# Altium PCB 1.8-TFT-128x160.PcbDoc
Units mil, origin at the board's own origin, x right, y up, seen from the top; angles counter-clockwise.
Board outline 2216.1 x 1354.33 mil, 2 copper layers (Top Layer, Bottom Layer); 12 components, 17 nets, 60 pads, 34 vias.
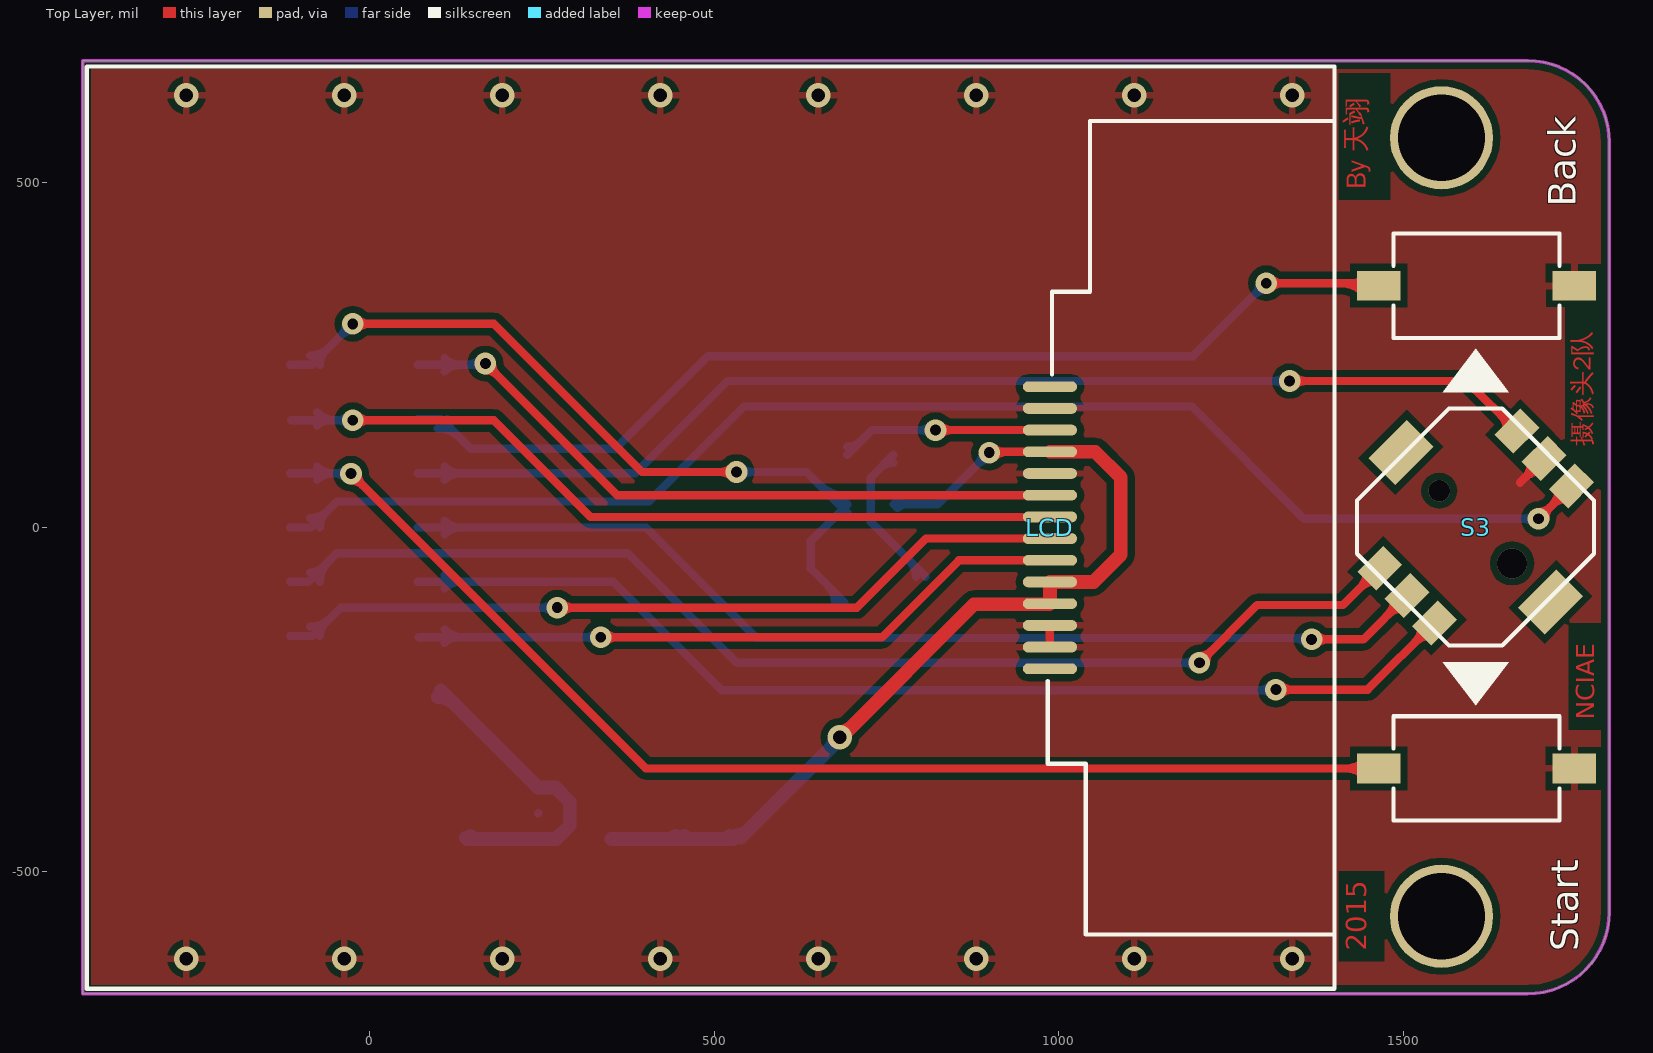
[diagram p0: Top Layer view]
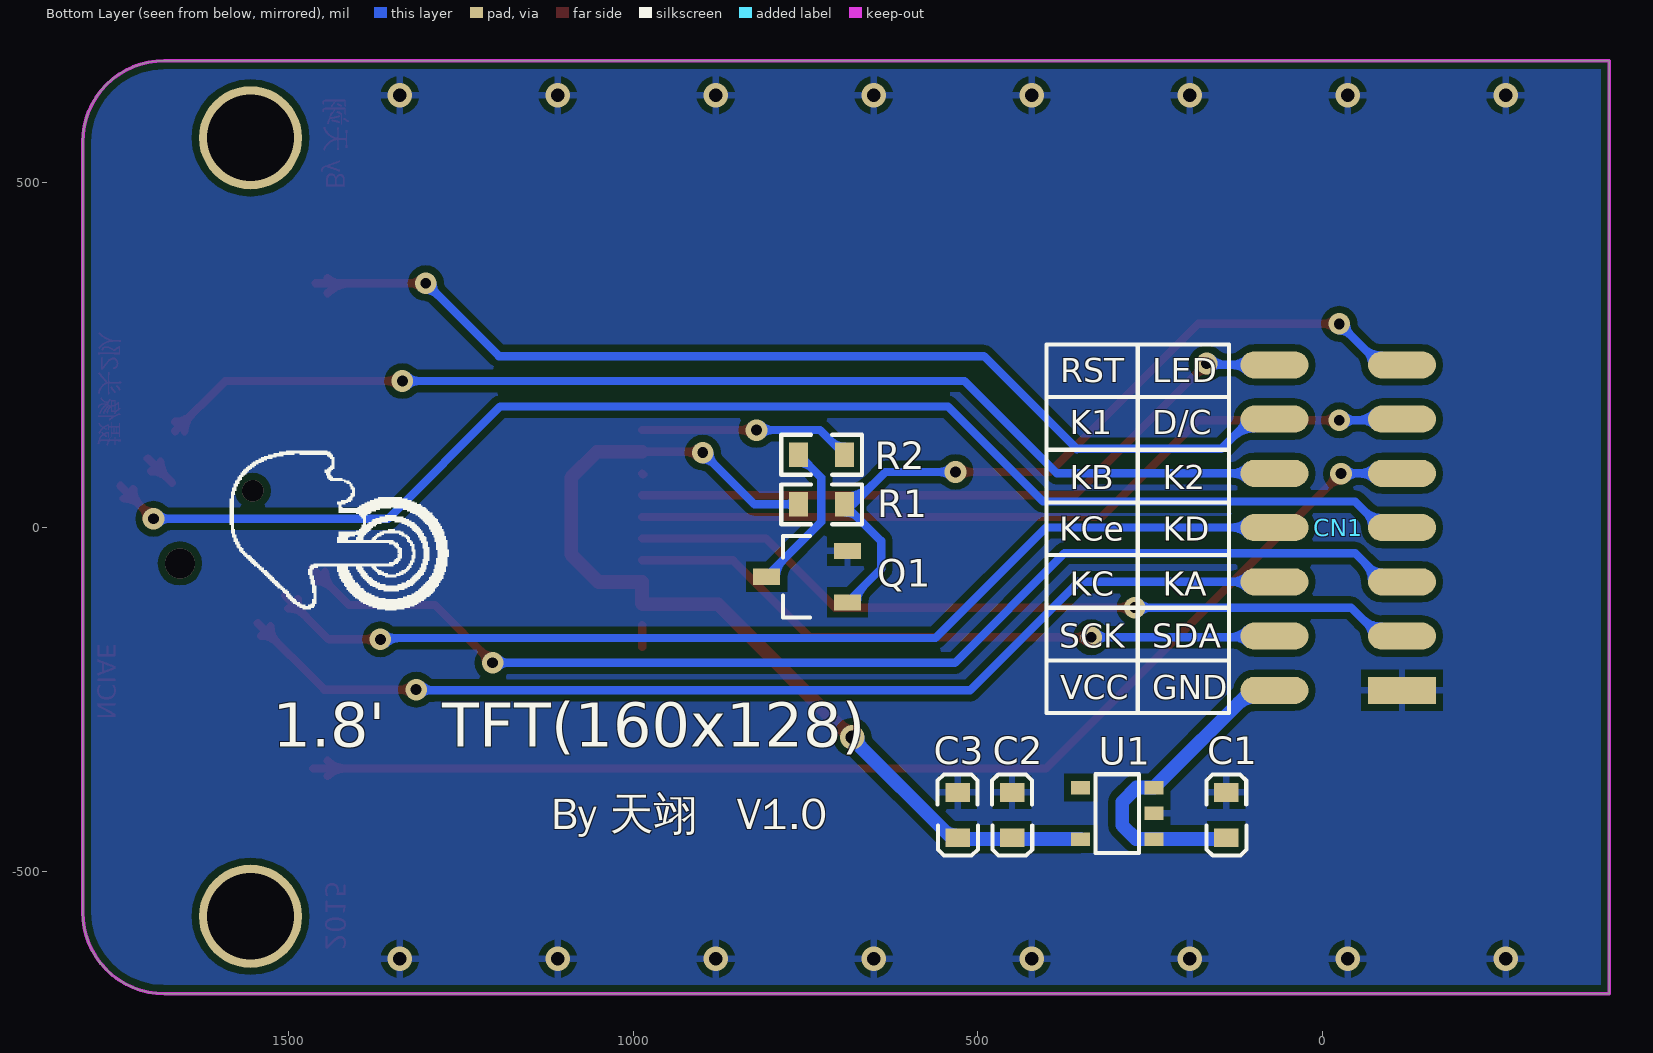
[diagram p1: Bottom Layer view, seen from below]
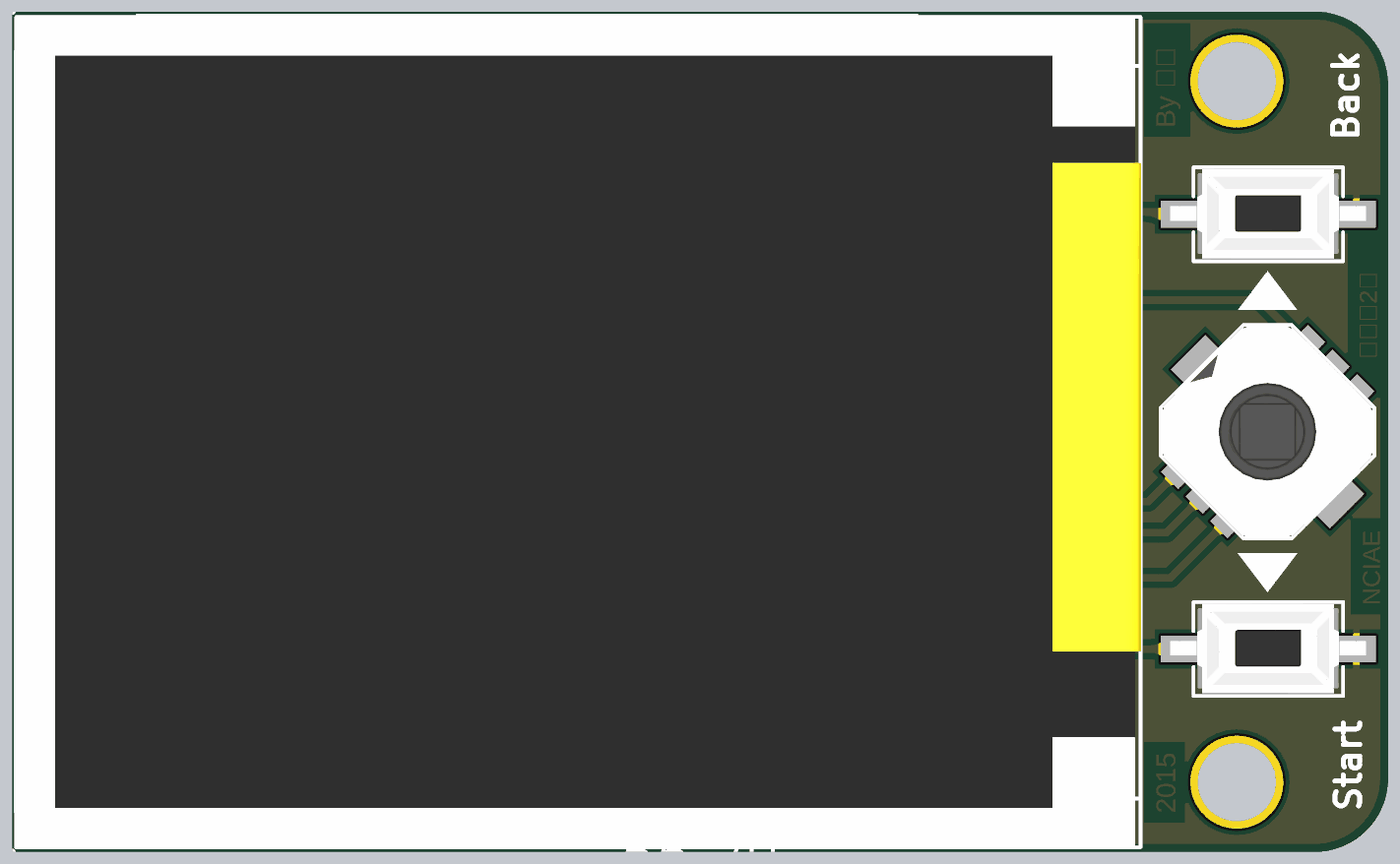
[diagram p2: 3D render of the assembled board from above, using the file's embedded part models]
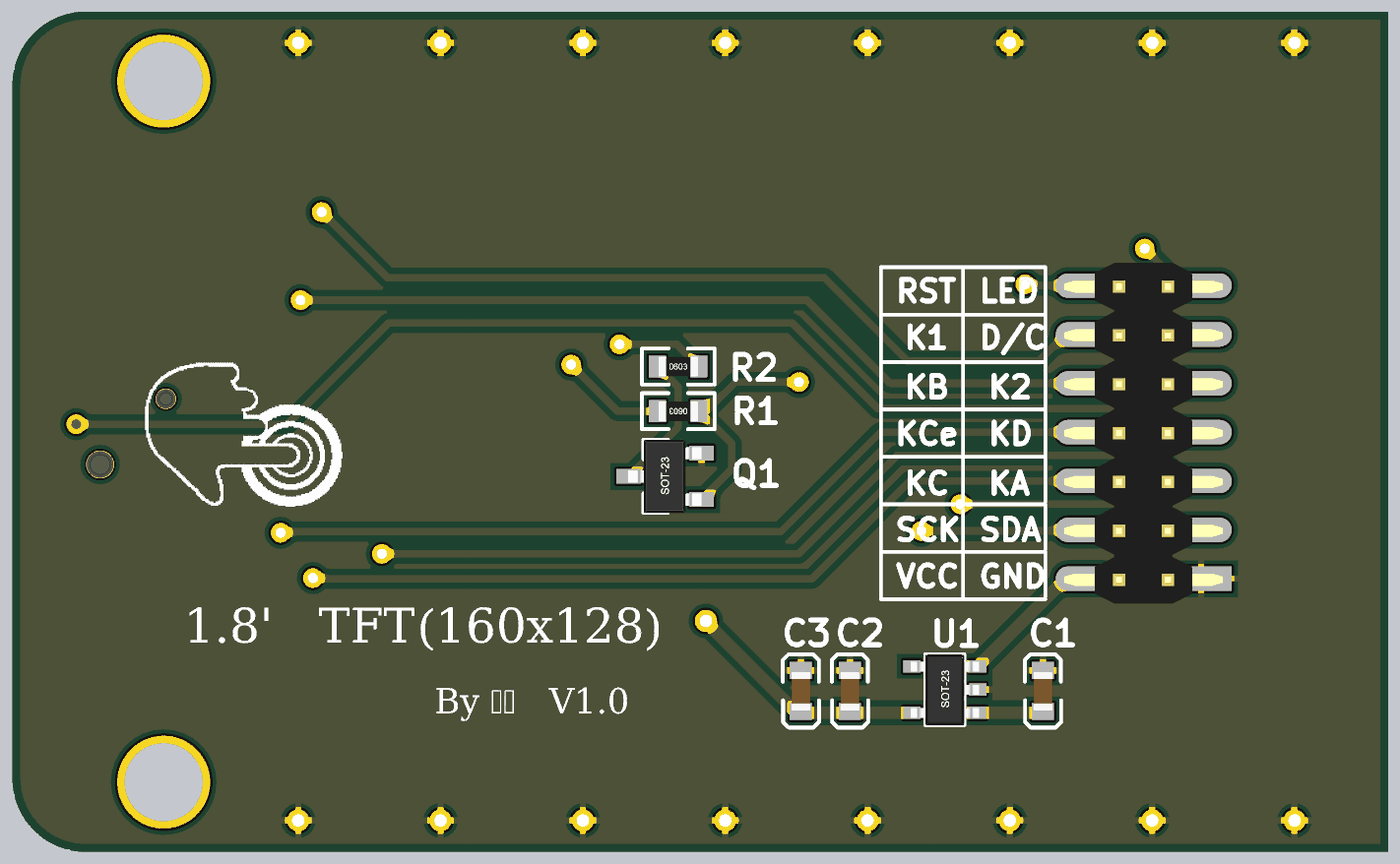
[diagram p3: 3D render of the assembled board from below, using the file's embedded part models]

## Layer stack, top to bottom
Top Layer: signal copper 1.4
Dielectric: dielectric 12.6, FR-4, Dk 4.8
Bottom Layer: signal copper 1.4

## Board outline
-417,-677.33 -417,677 1680.99,677 cw(c1680.99,558.89) 1799.1,558.89 1799.1,-559.22 cw(c1680.99,-559.22) 1680.99,-677.33

## Design rules (kind name [scope] priority, off if disabled: settings)
Clearance [All] p1: gap=10
ComponentClearance [All] p1: gap=0 collisioncheckmode=3 verticalgap=0 showdistances=FALSE
FabricationTestPointUsage TestPointUsage [All] p1: valid=0 allowmultiple=FALSE
FabricationTestpoint Testpoint [All] p1: side=3 testpointundercomponent=TRUE minsize=40 maxsize=100 preferedsize=60 minholesize=0 maxholesize=40 preferedholesize=32 testpointgrid=1 allowsidetop=TRUE allowsidebottom=TRUE usegrid=TRUE gridtolerance=0.01
HoleSize [All] p1: absolutevalues=TRUE maxlimit=157.48 minlimit=1 maxpercent=80.000 minpercent=20.000
PolygonConnect [All] p1: connectstyle=Relief reliefconductorwidth=10 reliefentries=4 polygonreliefangle="90 Angle" airgapwidth=10
RoutingVias [All] p1: holewidth=28 width=50 viastyle="Through Hole" minholewidth=28 minwidth=50 maxholewidth=28 maxwidth=50
SilkToSolderMaskClearance SilkscreenOverComponentPads [IsPad] p1: minsilkscreentomaskgap=10 clearancetoexposedcopper=TRUE
SolderMaskExpansion [All] p1: expansion=4
Width [All] p1: maxlimit=20 minlimit=10 preferedwidth=10
23 further rules are at their usual default settings.

## Components (designator, comment, footprint, x,y, rotation, side; value= is the part's Value field where it differs from the comment)
Back "Key" SW-PB-2 1606.3,350.39 r0 top locked (schematic designator S1)
C1 "0.1uF" CAP-0603 139,-385 r270 bottom
C2 "10nF" CAP-0603 450,-385 r270 bottom
C3 "4.7uF" CAP-0603 529,-385 r270 bottom
CN1 "CON-7X2" Pin-Header-2.00-Straight_SMD-14 -116,-237 r0 bottom
LCD "LCD-1.8-128*160" LCD-1.8-128*160-14P 987,-1 r180 top locked
Q1 "8050" SOT-23-3 755,-72 r0 bottom
R1 "10K" RES-0603 692.99,33 r0 bottom
R2 "10R" RES-0603 760,105 r180 bottom
S3 "Switch" SW-ALPS-5 1605,0 r45 top locked
Start "Key" SW-PB-2 1606.3,-350.39 r0 top locked (schematic designator S2)
U1 "ME6211-3.3" SOT-23-5 244,-453 r0 bottom

## Footprints (in the part's own frame and the unit in brackets; to place one, negate y for a bottom-side part, rotate by r counter-clockwise, add the part's x,y. Pads: shape width x height; smd on the part's side, far side on the other; paste and mask are expansions set on the pad)
CAP-0603 [mm]
  rect 0.7x0.9 smd: 1(0,0) 2(1.676,0)
  silkscreen extent -0.66,-0.74 2.34,0.75, body extent 0.05,-0.4 1.65,0.4, height 0.6
LCD-1.8-128*160-14P [mm]
  oval 2x0.4 smd: 1(0,-5.2) 2(0,-4.4) 3(0,-3.6) 4(0,-2.8) 5(0,-2) 6(0,-1.2) 7(0,-0.4) 8(0,0.4) 9(0,1.2) 10(0,2) 11(0,2.8) 12(0,3.6) 13(0,4.4) 14(0,5.2)
  silkscreen extent -10.5,-17 35.51,17, body extent -10.51,-17.13 35.61,17.07, height 2.8
Pin-Header-2.00-Straight_SMD-14 [mm]
  rect 2.5x1 smd: 1(0,0)
  oval 2.5x1 smd: 2(4.7,0) 3(0,-2) 4(4.7,-2) 5(0,-4) 6(4.7,-4) 7(0,-6) 8(4.7,-6) 9(0,-8) 10(4.7,-8) 11(0,-10) 12(4.7,-10) 13(0,-12) 14(4.7,-12)
  body extent -0.89,-12.93 5.61,1.02, height 6.4
RES-0603 [mm]
  rect 0.7x0.9 smd: 1(0,0) 2(1.702,0)
  silkscreen extent -0.64,-0.74 2.34,0.74, body extent 0.05,-0.4 1.65,0.4, height 0.47
SOT-23-3 [mm]
  rect 1x0.6 smd: 1(-1.679,0.95) 2(-1.679,-0.95) 3(1.302,0)
  silkscreen extent -0.3,-1.5 0.7,1.5, body extent -1.68,-1.5 1.32,1.5, height 1.3
SOT-23-5 [mm]
  rect 0.7x0.5 smd: 1(0,0) 2(0,-0.95) 3(0,-1.9) 4(2.7,-1.9) 5(2.7,0)
  silkscreen extent 0.55,-2.39 2.15,0.51, body extent -0.06,-2.39 2.74,0.51, height 1.45
SW-ALPS-5 [mm]
  rect 2x1.4 smd: 0(0,3.9) 0(0,-3.9)
  rect 1.35x1 smd: 1(-3.575,1.425) 2(-3.575,0) 3(-3.575,-1.425) 4(3.575,1.425) 5(3.575,0) 6(3.575,-1.425)
  silkscreen extent -3.78,-3.78 3.78,3.78, body extent -3.78,-3.78 3.77,3.77, height 4.81
SW-PB-2 [mm]
  rect 1.6x1.1 smd: 1(-3.6,0) 2(3.6,0)
  silkscreen extent -3.06,-1.92 3.06,1.92, body extent -4.01,-1.82 3.99,1.88, height 2.5

## Part data
Back Start: library part Key-PB-2
C1 C2 C3: library part Cap
LCD: library part LCD-1.8-128*160-14P
Q1: library part NPN
R1 R2: library part Res
S3: library part Switch-ALPS-5
U1: library part LDO

## Free pads (board coordinates)
  round 149.61 hole 125.98: 0(1555.49,-565) 0(1555.49,565)

## Via types
v1: diameter 35.43, hole 19.68, Top Layer to Bottom Layer, 17 vias
v2: diameter 31.5, hole 15.75, Top Layer to Bottom Layer, 15 vias
v3: diameter 43.31, hole 43.31, Top Layer to Bottom Layer, 1 vias
v4: diameter 31.5, hole 31.5, Top Layer to Bottom Layer, 1 vias

## Nets (pads, with @x,y where several pads share a name; then routed paths per layer and width w, separated by ;. In a path a pad name is that pad's centre, name@x,y a point inside that pad or via, vN(x,y) a via of type N, cw(c..) or ccw(c..) an arc to the next point about the centre after c; other vN are vias at no path point)
GND: Back.2 C1.1 C2.1 C3.1 CN1.1 LCD.2 LCD.5 LCD.12 LCD.13 Q1.2 S3.5 Start.2 U1.2 | length 136
  Top Layer w12: LCD.5@985.51,76.25 LCD.5 ; LCD.13 LCD.12 ; 1669.41,64.41 S3.5 ; S3.5@1685.97,94.65 cw(c1652.93,94.65) 1676.29,71.29 cw(c1699.65,47.93) S3.5@1699.65,80.97
  Bottom Layer w12: U1.2 U1.2@244.6,-415
  other v1: -266.4,-626.72 -37.1,-626.72 192.2,-626.72 421.5,-626.72 650.8,-626.72 880.1,-626.72 1109.4,-626.72 1338.7,-626.72 -266.4,626.73 -37.1,626.73 192.2,626.73 421.5,626.73 650.8,626.73 880.1,626.73 1109.4,626.73 1338.7,626.73
KEY_1: Back.1 CN1.12 | length 1695
  Top Layer w12: v2(1301,354) Back.1@1460.96,354 ; v2@1307.89,347.11 cw(c1324.53,330.47) 1324.53,354 cw(c1324.53,377.53) v2@1307.89,360.89 ; 1408.23,354 cw(c1408.23,303.9) Back.1@1443.66,339.32 ; 1425.64,354 ccw(c1425.64,379.48) Back.1@1443.66,361.46
  Bottom Layer w12: CN1.12 103.3,156.7 146.35,113.65 355.35,113.65 356,113 491,248 1195,248 v2(1301,354) ; CN1.12@98.57,143.02 cw(c98.57,98.55) 130.01,129.99 ; CN1.12@112.25,156.7 ccw(c133.87,156.7) 118.58,141.42 ; v2@1291.25,354 cw(c1267.72,354) 1284.36,337.36 cw(c1301,320.72) v2@1301,344.25
KEY_2: CN1.9 Start.1 | length 1943.2
  Top Layer w12: v2@-27.5,67.75 cw(c-27.5,44.22) -10.86,60.86 cw(c5.78,77.5) v2@-17.75,77.5 ; v2(-27.5,77.5) 400.39,-350.39 Start.1 ; Start.1@1443.66,-361.46 ccw(c1416.93,-388.18) 1416.93,-350.39 ccw(c1416.93,-312.6) Start.1@1443.66,-339.33
  Bottom Layer w12: CN1.9 -27.96,77.96 v2(-27.5,77.5) ; CN1.9@-76.8,68.28 cw(c-53.43,44.92) -53.43,77.96 cw(c-53.43,111) CN1.9@-76.8,87.64 ; -52.15,77.96 cw(c-52.15,52.85) v2@-34.39,70.61 ; -49.92,77.96 ccw(c-49.92,99.92) v2@-34.39,84.39
KEY_A: CN1.5 S3.1 | length 1899.4
  Top Layer w12: v2(1204,-197) 1288,-113 1412.66,-113 S3.1 ; v2@1204,-187.25 ccw(c1204,-163.72) 1220.64,-180.36 ccw(c1237.28,-197) v2@1213.75,-197 ; S3.1@1447.25,-64.73 cw(c1414.21,-64.73) 1437.57,-88.09 cw(c1460.93,-111.45) S3.1@1460.93,-78.41
  Bottom Layer w12: CN1.5 -89.52,-79.52 -48,-38 374,-38 533,-197 v2(1204,-197) ; CN1.5@-86.47,-65.83 ccw(c-86.47,-40.15) -68.31,-58.31 ; CN1.5@-72.79,-79.52 cw(c-32.39,-79.52) -60.96,-50.96 ; v2@1197.11,-203.89 ccw(c1180.47,-220.53) 1180.47,-197 ccw(c1180.47,-173.47) v2@1197.11,-190.11
KEY_B: CN1.10 S3.4 | length 1859.2
  Top Layer w12: v2(1335,212) 1592.05,212 S3.4 ; v2@1341.89,205.11 cw(c1358.53,188.47) 1358.53,212 cw(c1358.53,235.53) v2@1341.89,218.89 ; S3.4@1651.17,139.19 ccw(c1618.13,139.19) 1641.49,162.56 ccw(c1664.85,185.92) S3.4@1664.85,152.88
  Bottom Layer w12: CN1.10 384.96,77.96 519,212 v2(1335,212) ; CN1.10@108.24,68.28 cw(c131.61,44.92) 131.61,77.96 cw(c131.61,111) CN1.10@108.24,87.64 ; v2@1328.11,205.11 ccw(c1311.47,188.47) 1311.47,212 ccw(c1311.47,235.53) v2@1328.11,218.89
KEY_C: CN1.6 S3.3 | length 1759.6
  Top Layer w12: v2(1315,-236) 1448.34,-236 S3.3 ; v2@1321.89,-242.89 cw(c1338.53,-259.53) 1338.53,-236 cw(c1338.53,-212.47) v2@1321.89,-229.11 ; S3.3@1526.59,-144.07 cw(c1493.55,-144.07) 1516.91,-167.43 cw(c1540.27,-190.79) S3.3@1540.27,-157.75
  Bottom Layer w12: CN1.6 353.52,-79.52 511,-237 1314,-237 v2(1315,-236) ; CN1.6@108.24,-89.2 cw(c131.61,-112.56) 131.61,-79.52 cw(c131.61,-46.48) CN1.6@108.24,-69.84 ; 1289.05,-237 ccw(c1289.05,-210.05) v2@1308.11,-229.11 ; 1293.88,-237 cw(c1293.88,-257.12) v2@1308.11,-242.89
KEY_CENTER: CN1.8 S3.2 | length 1707.7
  Top Layer w12: v2(1367,-163) 1442,-163 S3.2 ; v2@1373.89,-169.89 cw(c1390.53,-186.53) 1390.53,-163 cw(c1390.53,-139.47) v2@1373.89,-156.11 ; S3.2@1486.92,-104.4 cw(c1453.88,-104.4) 1477.24,-127.76 cw(c1500.6,-151.12) S3.2@1500.6,-118.08
  Bottom Layer w12: CN1.8 400.78,-0.78 561,-161 1365,-161 v2(1367,-163) ; CN1.8@108.24,-10.46 cw(c131.61,-33.82) 131.61,-0.78 cw(c131.61,32.26) CN1.8@108.24,8.9 ; 1338.64,-161 cw(c1338.64,-191.36) v2@1360.11,-169.89 ; 1348.29,-161 ccw(c1348.29,-144.29) v2@1360.11,-156.11
KEY_D: CN1.7 S3.6 | length 2198.1
  Top Layer w12: v2(1696.34,12) S3.6 ; v2@1696.34,21.75 ccw(c1696.34,45.28) 1712.98,28.64 ccw(c1729.62,12) v2@1706.09,12 ; S3.6@1725.64,54.98 cw(c1692.6,54.98) 1715.96,31.62 cw(c1739.32,8.26) S3.6@1739.32,41.3
  Bottom Layer w12: CN1.7 -85.78,-0.78 -48,37 405,37 543,175 1193,175 1356,12 v2(1696.34,12) ; CN1.7@-86.47,12.91 ccw(c-86.47,47.62) -61.93,23.07 ; CN1.7@-72.79,-0.78 cw(c-41.42,-0.78) -63.6,21.4 ; v2@1689.45,5.11 ccw(c1672.81,-11.53) 1672.81,12 ccw(c1672.81,35.53) v2@1689.45,18.89
LCD_VCC: C2.2 C3.2 LCD.4 LCD.10 LCD.11 R1.2 U1.5 | length 1602.3
  Top Layer w12: v2@899,109.24 LCD.4 ; v2@905.89,101.11 cw(c925.52,81.48) 925.52,109.24 ; v2@905.89,114.89 ccw(c919.55,128.55) 919.55,109.24
  Top Layer w20: v1@682,-297.28 ccw(c682,-273.83) 698.59,-290.41 ; v1@683,-306 877,-112 LCD.11@986.24,-112 ; LCD.11 LCD.10 1050.26,-79.74 1090,-40 1090,72 1052.76,109.24 LCD.4
  Bottom Layer w12: R1.2 824,33 v2(899,108) ; R1.2@765.49,27.5 cw(c778.77,14.22) 778.77,33 cw(c778.77,51.78) R1.2@765.49,38.5 ; v2@889.25,108 cw(c865.72,108) 882.36,91.36 cw(c899,74.72) v2@899,98.25
  Bottom Layer w20: U1.5 527,-453 C3.2 ; 432.11,-453 ccw(c432.11,-437.05) C2.2@443.39,-448.33 ; C2.2@456.61,-448.33 ccw(c467.89,-437.05) 467.89,-453 ; 511.11,-453 ccw(c511.11,-437.05) C3.2@522.39,-448.33 ; C3.2@532.94,-447.22 ccw(c532.94,-425.87) 548.03,-440.97 ; C3.2@538,-451 v1@683,-306 ; 667.41,-321.59 ccw(c650.83,-305) v1@674.28,-305
  other v1: 682,-305
NetLCD_3: LCD.3 R2.2 | length 405
  Top Layer w12: v2(821,140.73) LCD.3 ; v2@827.89,133.84 cw(c844.53,117.2) 844.53,140.73 cw(c844.53,164.27) v2@827.89,147.62
  Bottom Layer w12: R2.2 728.73,140.73 v2(821,140.73) ; R2.2@693,116.72 ccw(c693,145) 713,125 ; v2@814.11,133.84 ccw(c797.47,117.2) 797.47,140.73 ccw(c797.47,164.27) v2@814.11,147.62
NetQ1_3: Q1.3 R2.1 | length 271.7
  Bottom Layer w12: 740,85 cw(c760,65) R2.1@760,93.28 ; R2.1 727,72 727,7.26 Q1.3 ; 782.9,-48.64 cw(c759.54,-72) Q1.3@792.57,-72
TFT_D/C: CN1.11 LCD.7 | length 1285.2
  Top Layer w12: v2(-25,155) 180,155 320.25,14.75 LCD.7 ; v2@-18.11,148.11 cw(c-1.47,131.47) -1.47,155 cw(c-1.47,178.53) v2@-18.11,161.89
  Bottom Layer w12: CN1.11@-114.3,155 v2(-25,155) ; CN1.11@-76.8,147.02 cw(c-57.54,127.77) -57.54,155 ; CN1.11@-76.8,166.38 ccw(c-49.33,193.84) -49.33,155 ; v2@-31.89,148.11 ccw(c-48.53,131.47) -48.53,155 ccw(c-48.53,178.53) v2@-31.89,161.89
TFT_LED: CN1.13 Q1.1 R1.1 | length 1441.9
  Top Layer w12: v2(-25,295) 180,295 395,80 v2(532,80) ; v2@-18.11,288.11 cw(c-1.47,271.47) -1.47,295 cw(c-1.47,318.53) v2@-18.11,301.89 ; v2@525.11,73.11 ccw(c508.47,56.47) 508.47,80 ccw(c508.47,103.53) v2@525.11,86.89
  Bottom Layer w12: CN1.13 -84.56,235.44 v2(-25,295) ; CN1.13@-86.47,249.13 ccw(c-86.47,286.78) -59.84,260.16 ; CN1.13@-72.79,235.44 cw(c-44.37,235.44) -64.46,255.54 ; v2@-34.75,295 cw(c-58.28,295) -41.64,278.36 cw(c-25,261.72) v2@-25,285.25 ; v2(532,80) 634,80 681,33 R1.1 640,-19.99 640,-60.52 Q1.1 ; v2@538.89,73.11 cw(c555.53,56.47) 555.53,80 cw(c555.53,103.53) v2@538.89,86.89 ; 652.52,61.48 ccw(c692.99,101.96) R1.1@692.99,44.72 ; 665.52,-86.04 cw(c642.16,-109.4) Q1.1@675.2,-109.4 ; 672.99,13 cw(c692.99,-7) R1.1@692.99,21.28 ; 673,41 ccw(c692.99,60.99) R1.1@692.99,32.72
TFT_RESET: CN1.14 LCD.6 | length 1121
  Top Layer w12: v2@167.5,227.75 cw(c167.5,204.22) 184.14,220.86 cw(c200.78,237.5) v2@177.25,237.5 ; v2(167.5,237.5) 358.76,46.24 LCD.6
  Bottom Layer w12: CN1.14 v2@165.44,235.44 ; CN1.14@108.24,225.76 cw(c131.61,202.4) 131.61,235.44 cw(c131.61,268.48) CN1.14@108.24,245.12 ; 138.99,235.44 ccw(c138.99,266.01) v2@160.61,244.39 ; 148.94,235.44 cw(c148.94,218.94) v2@160.61,230.61
TFT_SCK: CN1.4 LCD.9 | length 1088.3
  Top Layer w12: v2(335,-160) 743,-160 854.76,-48.24 LCD.9 ; v2@341.89,-166.89 cw(c358.53,-183.53) 358.53,-160 cw(c358.53,-136.47) v2@341.89,-153.11
  Bottom Layer w12: CN1.4@70.78,-160 v2(335,-160) ; CN1.4@108.24,-167.94 cw(c127.4,-187.1) 127.4,-160 ; CN1.4@108.24,-148.58 ccw(c135.81,-121.02) 135.81,-160 ; v2@328.11,-166.89 ccw(c311.47,-183.53) 311.47,-160 ccw(c311.47,-136.47) v2@328.11,-153.11
TFT_SDA: CN1.3 LCD.8 | length 1287.4
  Top Layer w12: v2(272,-117) 707,-117 807.25,-16.75 LCD.8 ; v2@278.89,-123.89 cw(c295.53,-140.53) 295.53,-117 cw(c295.53,-93.47) v2@278.89,-110.11
  Bottom Layer w12: CN1.3 -83.26,-158.26 -42,-117 v2(272,-117) ; CN1.3@-86.47,-144.57 ccw(c-86.47,-103.78) -57.63,-132.63 ; CN1.3@-72.79,-158.26 cw(c-47.5,-158.26) -65.38,-140.38 ; v2@265.11,-123.89 ccw(c248.47,-140.53) 248.47,-117 ccw(c248.47,-93.47) v2@265.11,-110.11
VCC: C1.2 CN1.2 U1.1 U1.3 | length 487.3
  Bottom Layer w20: CN1.2@98.57,-246.69 cw(c98.57,-280.29) 122.33,-256.53 ; CN1.2@102.8,-237 U1.3 269.2,-378.2 290,-399 290,-433 270,-453 U1.1 141,-453 C1.2 ; C1.2@145.61,-448.33 ccw(c156.89,-437.05) 156.89,-453
pads on no net: LCD.1 LCD.14 S3.0 U1.4
copper on no net:
  other v3: 1657.89,-52.89
  other v4: 1552.11,52.89

## Polygon pours and split planes (outlines as drawn)
GND on Top Layer "Top Layer-No Net" (solid, pour order 6): -417,677 -417,-677.33 1680.99,-677.33 1799.1,-677.33 1799.1,-559.22 1799.1,677 1670,677 -417,677
GND on Bottom Layer "Top Layer-No Net" (solid, pour order 8): -417,677 -417,-677.33 1799.1,-677.33 1799.1,-559.22 1799.1,677 1680.99,677 -417,677

## Keep-outs
Keep-Out Layer:
  the board outline again, w5

## Other copper
Top Layer:
  text "By 天翊" at 1455.78,490 h50 r90
  text "摄像头2队" at 1781,117 h45 r90
  text "NCIAE" at 1786.05,-280 h45 r90
  text "2015" at 1456.42,-615 h50 r90

## Silkscreen, mask and mechanical layers (free items; w line width, h text height)
Top Overlay:
  region: 1557,-196 1653,-196 1605,-259
  region: 1653,196 1557,196 1605,259
Bottom Overlay:
  drawing of 1173 lines, arcs and shapes, not listed
  text "LED" at 246.18,210 h35
  text "RST" at 380,210 h35
  text "D/C" at 246.18,135 h35
  text "K1" at 366.18,135 h35
  text "K2" at 231.18,55 h35
  text "KB" at 366.18,55 h35
  text "KD" at 231.18,-20 h35
  text "KCe" at 381.18,-20 h35
  text "KA" at 231.18,-100 h35
  text "KC" at 366.18,-100 h35
  text "SDA" at 246.18,-175 h35
  text "SCK" at 381.18,-175 h35
  text "GND" at 246.18,-250 h35
  text "VCC" at 380,-250 h35
  text "1.8'   TFT(160x128)" at 1523,-340 h110
  text "By 天翊   V1.0" at 1119,-454 h80
Mechanical 16:
  drawing of 1873 lines, arcs and shapes, not listed
  text "1" at -3865,3877 h70
  text "2" at -1005,3877 h70
  text "3" at 1875,3877 h70
  text "4" at 4745,3877 h70
  text "A" at -5217,2971 h70
  text "A" at 6083,2971 h70
  text "B" at -5217,1079 h70
  text "B" at 6083,1079 h70
  text "C" at 1153,30.73 h70
  text "C" at -5217,-831 h70
  text "ENGINEER:" at 1558,-2288 h45
  text "TITLE:" at 3058,-2288 h45
  text "PCB DESIGNER:" at 1558,-2583 h45
  text "D" at -5217,-2721 h70
  text "D" at 6083,-2721 h70
  text "DATE:" at 1558,-2888 h45
  text "PART NO.:" at 3058,-2888 h45
  text "REV:" at 5158,-2888 h45
  text "Altium Limited" at 258,-2988 h70
  text ".PRINT_DATE" at 1608,-3008 h70
  text "12a Rodborough Rd" at 258,-3088 h70
  text "Frenchs Forest" at 258,-3188 h70
  text "FILE NAME:" at 1558,-3188 h45
  text "DWG NO:" at 3058,-3188 h45
  text "SCALE:" at 5158,-3188 h45
  text "NSW 2086" at 258,-3288 h70
  text ".PCB_FILE_NAME_NO_PATH" at 1608,-3308 h70
  text "1" at -3865,-3523 h70
  text "2" at -1005,-3523 h70
  text "3" at 1875,-3523 h70
  text "4" at 4745,-3523 h70

## Dimensions
-417,-677.33 to -417,677 on Top Overlay
-417,-677.33 to 1799.1,-559.22 on Top Overlay